# EAGLE board zerofat2_a (EAGLE 7.5.0)
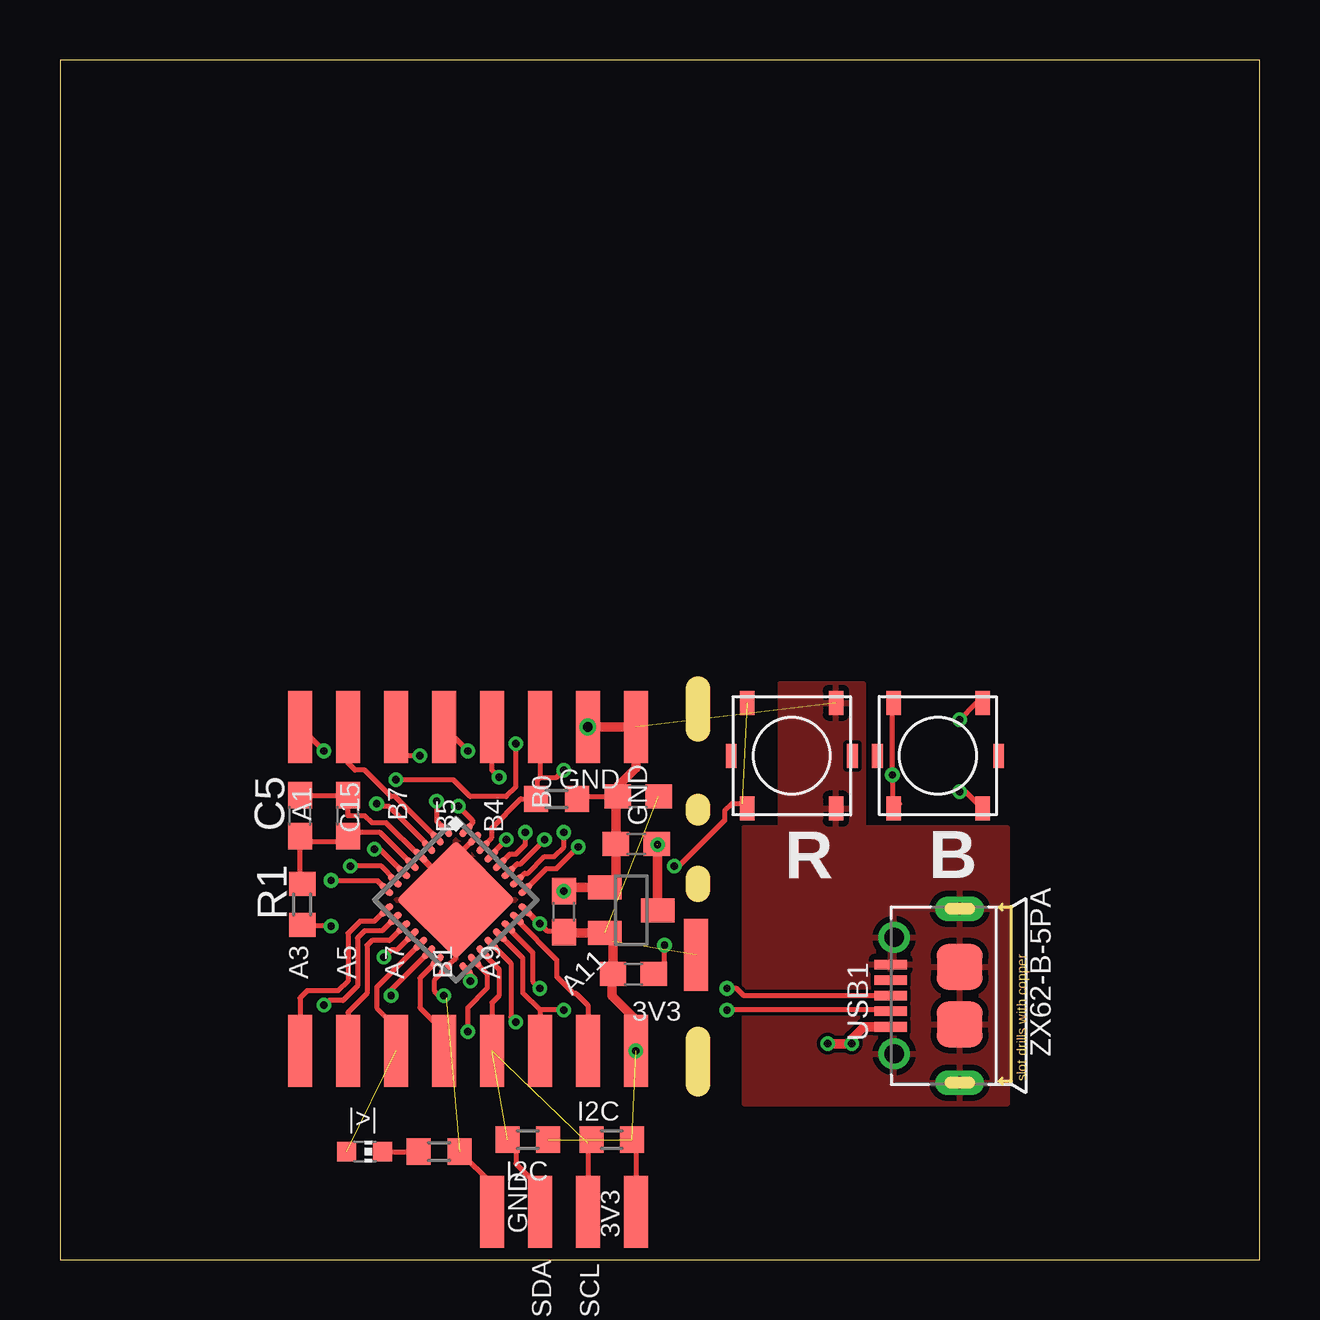
[diagram p0: board, top side]
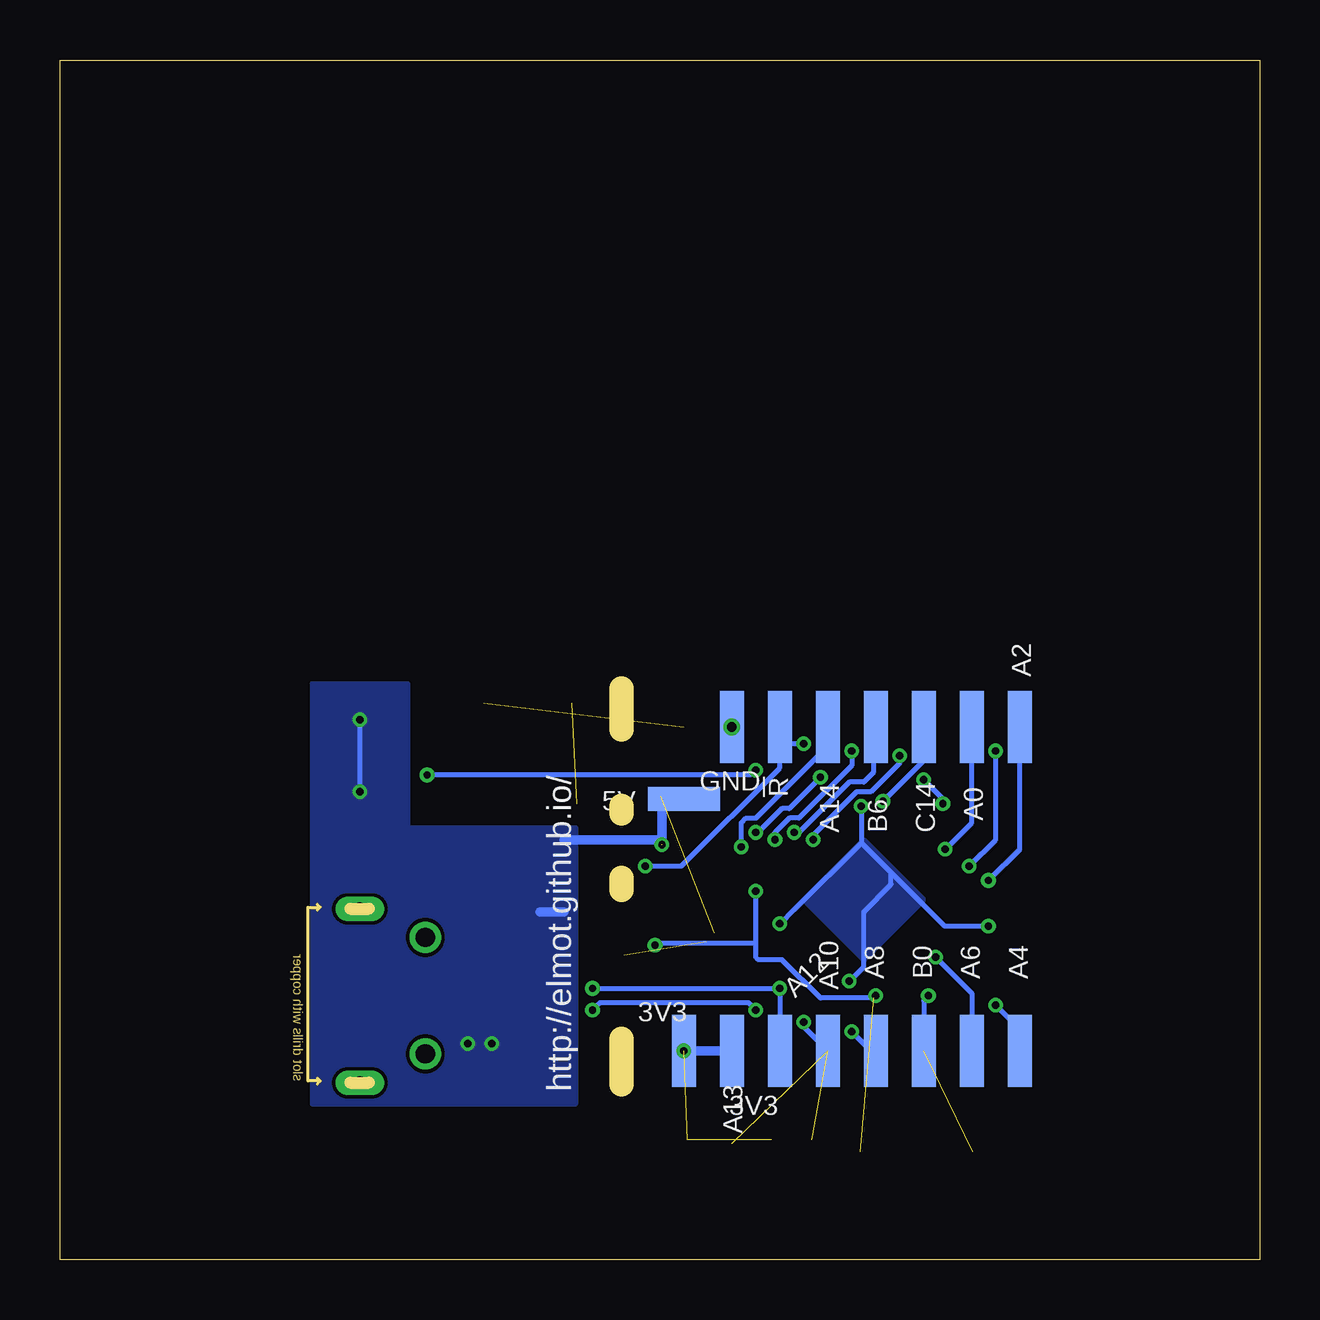
[diagram p1: board, bottom side, seen from below]

Size 50 x 50 mm. Coordinates in mm from the lower left corner, seen from the top.
Outline: 26.6,7.3 26.6,9.2
Outline: 26.6,18.9 26.6,18.6
Outline: 26.6,22.1 26.6,23.8
Outline: 26.6,15.4 26.6,15.9
Outline: 0,0 50,0 50,50 0,50 0,0
Copper layers (1*16): Top 0.035mm / dielectric 1.5mm / Bottom 0.035mm
Design rules "SeeedStudio_2layer_DRU_no_angle_20140221 *": minimum track width 6mil, minimum drill 12mil, track to track 6mil, track to pad 6mil, pad to pad 6mil, via to via 6mil, smd to smd 0mil, copper to edge 10mil, drill to drill 10mil, minimum pad ring 10mil, minimum via ring 6mil, stop-mask expansion 2mil, vias tented up to drill 100mil, thermal gap 10mil
Net classes: 0 default: width 0.2 mm; 1 PWR: width 0.2 mm; 2 GND: width 0.2 mm

## Footprints (pad centres in the part's own frame; a part is rotated, then mirrored left to right if it is on the bottom)
EVQPT5A15 = smd 0.45 x 1: GND1 -2.525,0; GND2 2.525,0 | smd 0.6 x 1: P1 -1.85,-2.2; P2 -1.85,2.2; P3 1.85,2.2; P4 1.85,-2.2
C0603 = smd 1.1 x 1: 1 -0.85,0; 2 0.85,0
SOT23 = smd 1 x 1.4: 1 -0.95,-1.1; 2 0.95,-1.1; 3 0,1.1
CHIP-LED0603 = smd 0.8 x 0.8: A 0,-0.75; C 0,0.75
PAD_MINIMAL = smd 1 x 3: 1 0,0
R0603 = smd 1 x 1.1: 1 -0.85,0; 2 0.85,0
UFQFPN32 = smd 0.7 x 0.3: 1 -2.35,1.75; 2 -2.35,1.25; 3 -2.35,0.75; 4 -2.35,0.25; 5 -2.35,-0.25; 6 -2.35,-0.75; 7 -2.35,-1.25; 8 -2.35,-1.75; 17 2.35,-1.75; 18 2.35,-1.25; 19 2.35,-0.75; 20 2.35,-0.25; 21 2.35,0.25; 22 2.35,0.75; 23 2.35,1.25; 24 2.35,1.75 | smd 0.3 x 0.7: 9 -1.75,-2.35; 10 -1.25,-2.35; 11 -0.75,-2.35; 12 -0.25,-2.35; 13 0.25,-2.35; 14 0.75,-2.35; 15 1.25,-2.35; 16 1.75,-2.35; 25 1.75,2.35; 26 1.25,2.35; 27 0.75,2.35; 28 0.25,2.35; 29 -0.25,2.35; 30 -0.75,2.35; 31 -1.25,2.35; 32 -1.75,2.35 | smd 3.5 x 3.5: EXP 0,0
MICRO-USB5+6P-SMD-0.65-AB = smd 0.4 x 1.35: 1 -1.3,2.875; 2 -0.65,2.875; 3 0,2.875; 4 0.65,2.875; 5 1.3,2.875 | smd 1.9 x 1.9: P1 -1.2,0; P2 1.2,0 | drill 0.508 pad 1.016 long: P3 -3.625,0; P4 3.625,0 | drill 0.8: P5 -2.425,2.73; P6 2.425,2.73

## Placement (x,y rotation side)
B  EVQPT5A15  [EVQPT5A15]  36.6,21 0 top
C1  1uF  [C0603]  24.02,17.33 180 top
C2  100nF  [C0603]  24.1,19.3 180 top
C3  100nF  [C0603]  21,14.5 90 top
C4  100nF  [C0603]  12,18.5 90 top
C5  1uF  [C0603]  10,18.5 90 top
C6  4.7uF  [C0603]  23.9,11.9 180 top
IC1  MCP1703T-3302E/CB  [SOT23]  23.81,14.56 270 top
LED1  ORANGE  [CHIP-LED0603]  12.7,4.5 270 top
PAD1  SCL  [PAD_MINIMAL]  22,2 0 top
PAD2  SDA  [PAD_MINIMAL]  20,2 0 top
PAD3  C14  [PAD_MINIMAL]  14,22.2 0 bottom
PAD4  C15  [PAD_MINIMAL]  12,22.2 0 top
PAD6  !R  [PAD_MINIMAL]  20,22.2 180 bottom
PAD8  A0  [PAD_MINIMAL]  12,22.2 0 bottom
PAD9  A2  [PAD_MINIMAL]  10,22.2 0 bottom
PAD10  A1  [PAD_MINIMAL]  10,22.2 0 top
PAD11  A3  [PAD_MINIMAL]  10,8.7 180 top
PAD12  A5  [PAD_MINIMAL]  12,8.7 180 top
PAD13  A7  [PAD_MINIMAL]  14,8.7 180 top
PAD14  B1  [PAD_MINIMAL]  16,8.7 180 top
PAD16  A4  [PAD_MINIMAL]  10,8.7 180 bottom
PAD17  A6  [PAD_MINIMAL]  12,8.7 180 bottom
PAD18  B0  [PAD_MINIMAL]  14,8.7 180 bottom
PAD24  A8  [PAD_MINIMAL]  16,8.7 180 bottom
PAD25  A9  [PAD_MINIMAL]  18,8.7 180 top
PAD26  A10  [PAD_MINIMAL]  18,8.7 180 bottom
PAD27  A13  [PAD_MINIMAL]  22,8.7 180 top
PAD29  A12  [PAD_MINIMAL]  20,8.7 180 bottom
PAD30  A11  [PAD_MINIMAL]  20,8.7 180 top
PAD31  A14  [PAD_MINIMAL]  18,22.2 0 bottom
PAD33  B5  [PAD_MINIMAL]  16,22.2 0 top
PAD34  B7  [PAD_MINIMAL]  14,22.2 0 top
PAD35  B0  [PAD_MINIMAL]  20,22.2 0 top
PAD36  B6  [PAD_MINIMAL]  16,22.2 0 bottom
PAD37  B4  [PAD_MINIMAL]  18,22.2 0 top
PAD39  GND  [PAD_MINIMAL]  22,22.2 0 bottom
PAD43  3V3  [PAD_MINIMAL]  24,8.7 0 top
PAD45  5V  [PAD_MINIMAL]  24,19.2 270 bottom
PAD48  3V3  [PAD_MINIMAL]  24,8.7 0 bottom
PAD49  GND  [PAD_MINIMAL]  22,22.2 0 top
PAD50  GND  [PAD_MINIMAL]  24,22.2 0 top
PAD51  GND  [PAD_MINIMAL]  18,2 0 top
PAD52  3V3  [PAD_MINIMAL]  26.5,12.7 0 top
PAD53  3V3  [PAD_MINIMAL]  22,8.7 0 bottom
PAD54  3V3  [PAD_MINIMAL]  24,2 180 top
R  EVQPT5A15  [EVQPT5A15]  30.5,21 180 top
R1  10R  [R0603]  10.1,14.8 90 top
R2  2.2K  [R0603]  20.7,19.2 180 top
R3  I2C  [R0603]  19.5,5 0 top
R4  I2C  [R0603]  23,5 180 top
R5  2.2K  [R0603]  15.8,4.5 0 top
U$1  STM32L082K  [UFQFPN32]  16.5,15 315 top
USB1  ZX62-B-5PA  [MICRO-USB5+6P-SMD-0.65-AB]  37.5,11 90 top

## Library data of the parts
B PAD1-PAD4 PAD6 PAD8-PAD14 PAD16-PAD18 PAD24-PAD27 PAD29-PAD31 PAD33-PAD37 PAD39 PAD43 PAD45 PAD48-PAD54 R U$1 = zerofat
C1-C6 R1-R5 = rcl
IC1 = v-reg
LED1 = led
USB1 = Seeed-OPL-Connector; MPN: ZX62-B-5PA

## Nets
+3V3 [PWR]: C2.1 C3.1 C6.2 IC1.2 PAD43.1 PAD48.1 PAD52.1 PAD53.1 PAD54.1 R1.1 R3.2 R4.1 U$1.17 U$1.24 U$1.32
+5V: B.P3 B.P4 C1.1 IC1.3 PAD45.1 USB1.1
GND: C1.2 C2.2 C3.2 C4.2 C5.2 C6.1 IC1.1 PAD39.1 PAD49.1 PAD50.1 PAD51.1 R2.1 R5.2 R.P1 R.P2 U$1.4 U$1.16 U$1.31 U$1.EXP USB1.5 USB1.P1 USB1.P2 USB1.P3 USB1.P4 USB1.P5 USB1.P6
N$1: PAD30.1 U$1.21 USB1.2
N$2: LED1.A PAD18.1 U$1.14
N$3: PAD27.1 U$1.23
N$4: PAD29.1 U$1.22 USB1.3
N$5: PAD31.1 U$1.25
N$6: PAD3.1 U$1.1
N$7: PAD37.1 U$1.26
N$8: PAD33.1 U$1.27
N$9: PAD36.1 U$1.28
N$10: PAD4.1 U$1.2
N$11: PAD8.1 U$1.6
N$12: PAD10.1 U$1.7
N$13: PAD9.1 U$1.8
N$14: PAD11.1 U$1.9
N$15: PAD16.1 U$1.10
N$16: PAD12.1 U$1.11
N$17: PAD17.1 U$1.12
N$18: PAD13.1 U$1.13
N$19: PAD24.1 U$1.18
N$20: PAD14.1 U$1.15
N$21: PAD1.1 PAD25.1 R4.2 U$1.19
N$22: PAD34.1 U$1.29
N$23: PAD2.1 PAD26.1 R3.1 U$1.20
N$41: LED1.C R5.1
N$43: B.P1 B.P2 PAD35.1 R2.2 U$1.30
N$45: PAD6.1 R.P3 R.P4 U$1.3
VCCINT: C4.1 C5.1 R1.2 U$1.5

## Tracks (layer width: path | path; a pad name or v marks a point on that pad's centre or on a via)
+3V3  (via drill 0.3, 0.3 pad 0.3)  (4 unrouted)
  Top 0.2: R4.1 24,4.85 PAD54.1 | 21.04,13.61 C3.1 20.95,13.7 20.3,13.7 v20,14 | IC1.2 23.05,13.27 | C6.2 23,11.85 | v20,14 19.42,14.58 U$1.24 19.98,14 v20,14 | U$1.32 16.92,17.92 17.2,18.2 17.2,18.3 v16.6,18.9 | U$1.17 16.92,12.08 17.3,11.7 17.2,11.7 v17.1,11.6 | v11.3,13.9 10.15,13.9 arc-90 R1.1
  Top 0.4: 21.04,13.61 IC1.2 | 23.05,13.27 C6.2 | 23,11.85 23,11 24,10 PAD48.1
  Bottom 0.2: PAD48.1 24,9.5 | v16.6,18.9 16.6,17.38 | 16.6,17.38 U$1.24 19.42,14.58 v20,14 | 15.36,16.14 13.12,13.9 v11.3,13.9 | 15.36,16.14 16.6,17.38 | v17.1,11.6 16.5,12.2 16.5,14.5 15.36,15.64 15.36,16.14
  Bottom 0.4: PAD48.1 PAD53.1
  other vias: 24,8.7
  pour Bottom: 14,15 16.5,17.5 19,15 16.5,12.5
+5V  (via drill 0.3 pad 0.3)  (1 unrouted)
  Top 0.2: IC1.3 24.89,14.56 24.95,14.5 | 38.45,18.45 B.P4 37.75,19.5 v37.5,19.5 | v37.5,22.5 38.2,23.2 B.P3
  Top 0.4: USB1.1 33.5,9.7 33,9.2 v33,9 v32,9 | v24.91,17.29 IC1.3 | C1.1 v24.9,17.3
  Bottom 0.2: v37.5,19.5 v37.5,22.5
  Bottom 0.4: 29,14.5 30,14.5 | PAD45.1 24.8,19.2 25,19 24.91,18.91 v24.91,17.29 25.12,17.5 29,17.5
  pour Bottom: 35.5,18 35.5,24 39.5,24 39.5,6.5 28.5,6.5 28.5,18
GND  (via drill 0.3, 0.4)  (2 unrouted)
  Top 0.2: R5.2 18,3.15 PAD51.1 | 16.6,14.9 U$1.EXP | U$1.EXP 16.5,15.35 U$1.4 | U$1.4 15.02,16.79 15.7,16.1 15.83,16.1 U$1.31 | U$1.EXP 16.5,12.6 16.1,12.2 16.1,12.1 U$1.16 15.6,11.62 15.6,11.2 15.8,11 v16,11 | C5.2 C4.2 12,18.5 12.7,18.5 13,18.2 13.6,18.2 14.96,16.84 U$1.4 | 23.17,15.97 IC1.1 | C3.2 21.16,15.51 | R2.1 21.65,19.3 C2.2 | C6.1 25.2,12.35 v25.2,13.1
  Top 0.4: IC1.1 21.16,15.51 | 23.17,15.97 C1.2 23.17,19.3 C2.2 23.25,19.75 24,20.5 PAD50.1 PAD49.1
  Bottom 0.2: v16,11 16.1,10.9 18.3,10.9 19.9,12.5 20.9,12.5 21,12.6 21,13.2 | 21,13.2 C3.2 | v25.2,13.1 25.1,13.2 21,13.2
  other vias: 22,22.2 21,15.35
  pour Top: 33.5,18 33.5,24 30,24 30,18 28.5,18 28.5,6.5 39.5,6.5 39.5,18
  pour Top: 14,15 16.5,12.5 19,15 16.5,17.5
N$1  (via drill 0.3 pad 0.3)
  Top 0.2: 18.34,13.46 U$1.21 19.3,12.55 19.3,11.1 20,10.4 | 19.7,10.1 19.7,9 PAD30.1 20,10.4 | USB1.2 34.58,10.4 v27.8,10.4 | v21,10.4 20,10.4
  Bottom 0.2: v21,10.4 21.3,10.7 27.5,10.7 v27.8,10.4
N$2  (via drill 0.3 pad 0.3)  (1 unrouted)
  Top 0.2: U$1.14 13.8,11.24 v13.8,11
  Bottom 0.2: v13.8,11 14,10.8 PAD18.1
N$3
  Top 0.2: U$1.23 19.05,14.15 20.7,12.5 20.7,11.8 21.4,11.1 21.5,11.1 22,10.6 PAD27.1
N$4  (via drill 0.3 pad 0.3)
  Top 0.2: U$1.22 18.69,13.81 19.7,12.8 19.7,11.6 v20,11.3 | USB1.3 28.5,11 28.2,11.3 v27.8,11.3
  Bottom 0.2: PAD29.1 v20,11.3 v27.8,11.3
N$5  (via drill 0.3 pad 0.3)
  Top 0.2: U$1.25 20.27,16.3 20.7,16.3 v21.6,17.2
  Bottom 0.2: PAD31.1 18,21.4 21,18.4 21.4,18.4 21.6,18.2 v21.6,17.2
N$6  (via drill 0.3 pad 0.3)
  Top 0.2: U$1.1 15.7,18.27 v15.7,19.1
  Bottom 0.2: 14,21 PAD3.1 14,20.8 v15.7,19.1
N$7  (via drill 0.3 pad 0.3)
  Top 0.2: PAD37.1 18,20.4 v18.3,20.1 | U$1.26 19.37,16.1 19.5,16.1 20.2,16.8 20.6,16.8 21,17.2 v21,17.8
  Bottom 0.2: v18.3,20.1 19.6,18.8 19.9,18.8 20.9,17.8 v21,17.8
N$8  (via drill 0.3 pad 0.3)
  Top 0.2: v17,21.2 PAD33.1 | U$1.27 19.06,16.5 19.2,16.5 v20.2,17.5
  Bottom 0.2: v17,21.2 17,20.6 19.2,18.4 19.6,18.4 20.2,17.8 v20.2,17.5
N$9  (via drill 0.3 pad 0.3)
  Top 0.2: U$1.28 18.75,16.9 19,16.9 19.4,17.3 v19.4,17.8
  Bottom 0.2: PAD36.1 16,21.2 16.1,21.1 16.1,20.3 16.5,19.9 17.1,19.9 19.2,17.8 v19.4,17.8
N$10
  Top 0.2: PAD4.1 12,20.7 12.3,20.4 12.7,20.4 13.8,19.3 13.97,19.3 U$1.2
N$11  (via drill 0.3)
  Top 0.2: U$1.6 13.34,17.1 v13.1,17.1
  Bottom 0.2: v13.1,17.1 12,18.2 PAD8.1
N$12  (via drill 0.3, 0.3 pad 0.3)
  Top 0.2: PAD10.1 v11,21.2 | U$1.7 13.95,15.85 13.4,16.4 v12.1,16.4
  Bottom 0.2: v11,21.2 11,17.5 v12.1,16.4
N$13  (via drill 0.3)
  Top 0.2: U$1.8 13.22,15.8 v11.3,15.8
  Bottom 0.2: PAD9.1 10,17.1 v11.3,15.8
N$14
  Top 0.2: U$1.9 13.58,14.58 13.1,14.1 12.5,14.1 12,13.6 12,11.6 11.6,11.2 10.3,11.2 10,10.9 PAD11.1
N$15  (via drill 0.3)
  Top 0.2: U$1.10 13.43,13.7 12.7,13.7 12.4,13.4 12.4,11.4 11.8,10.8 11.2,10.8 v11,10.6
  Bottom 0.2: v11,10.6 10,9.6 PAD16.1
N$16
  Top 0.2: U$1.11 13.74,13.3 13,13.3 12.8,13.1 12.8,11.1 12,10.3 PAD12.1
N$17  (via drill 0.3)
  Top 0.2: U$1.12 14.05,12.9 13.8,12.9 v13.5,12.6
  Bottom 0.2: v13.5,12.6 12,11.1 PAD17.1
N$18
  Top 0.2: U$1.13 13.2,11.35 13.2,10.5 14,9.7 PAD13.1
N$19  (via drill 0.3 pad 0.3)
  Top 0.2: v17,9.5 17,10.5 17.8,11.3 17.8,11.9 17.28,12.42 U$1.18
  Bottom 0.2: PAD24.1 16.2,8.7 v17,9.5
N$20
  Top 0.2: U$1.15 15,11.73 15,10.5 16,9.5 PAD14.1
N$21  (1 unrouted)
  Top 0.2: R4.2 22,4.85 PAD1.1 | U$1.19 17.63,12.77 18.3,12.1 18.3,11 18,10.7 PAD25.1
N$22  (via drill 0.3, 0.3 pad 0.3)
  Top 0.2: U$1.29 17.98,16.89 v18.6,17.5 | PAD34.1 14,21.2 14.2,21 v15,21
  Bottom 0.2: v18.6,17.5 18.6,17.7 16.8,19.5 16.2,19.5 15,20.7 v15,21
N$23  (via drill 0.3 pad 0.3)  (1 unrouted)
  Top 0.2: R3.1 19,4.65 19,4 20,3 PAD2.1 | v19,9.9 18.8,10.1 18.8,12.35 U$1.20
  Bottom 0.2: v19,9.9 19,9.7 PAD26.1
N$41
  Top 0.2: LED1.C R5.1
N$43  (via drill 0.3)
  Top 0.2: 34.75,19 B.P1 34.7,18.8 v34.7,20.2 34.7,23.2 B.P2 | U$1.30 17.63,17.23 18,17.6 18,18 19.2,19.2 R2.2 19.9,19.25 19.9,20 20,20.1 | 20,20.1 20.7,20.1 v21,20.4 | 34.75,19 35,19 | 34.75,19 34.7,19 34.7,19.1 | PAD35.1 20,20.1
  Bottom 0.2: v21,20.4 21.2,20.2 v34.7,20.2
N$45  (via drill 0.3)  (1 unrouted)
  Top 0.2: v14,20 16.4,20 17.1,19.3 18.6,19.3 19,19.7 v19,21.5 | v13.2,19 13.3,18.9 13.7,18.9 15.37,17.23 U$1.3 | R.P3 28.45,19 28,19 27.7,18.7 27.7,18.3 25.8,16.4 v25.6,16.4
  Bottom 0.2: v14,20 13.2,19.2 v13.2,19 | v25.6,16.4 24.1,16.4 20,20.5 20,21.5 | 20,21.5 PAD6.1 | v19,21.5 20,21.5
VCCINT
  Top 0.2: R1.2 10,15.75 C5.1 10.25,17.4 11.75,17.4 C4.1 12,17.8 13.35,17.8 U$1.5

## Text on the board
tNames: R | B | |>|
bNames: http://elmot.github.io/
bValues: 4x / 100nF
bStop: (c)elmot | ZeroFat32